# Altium PCB Camera.PcbDoc
Units mm, origin at the board's own origin, x right, y up, seen from the top; angles counter-clockwise.
Board outline 25 x 19.75 mm, 2 copper layers (Top Layer, Bottom Layer); 3 components, 0 nets, 59 pads, 0 vias.
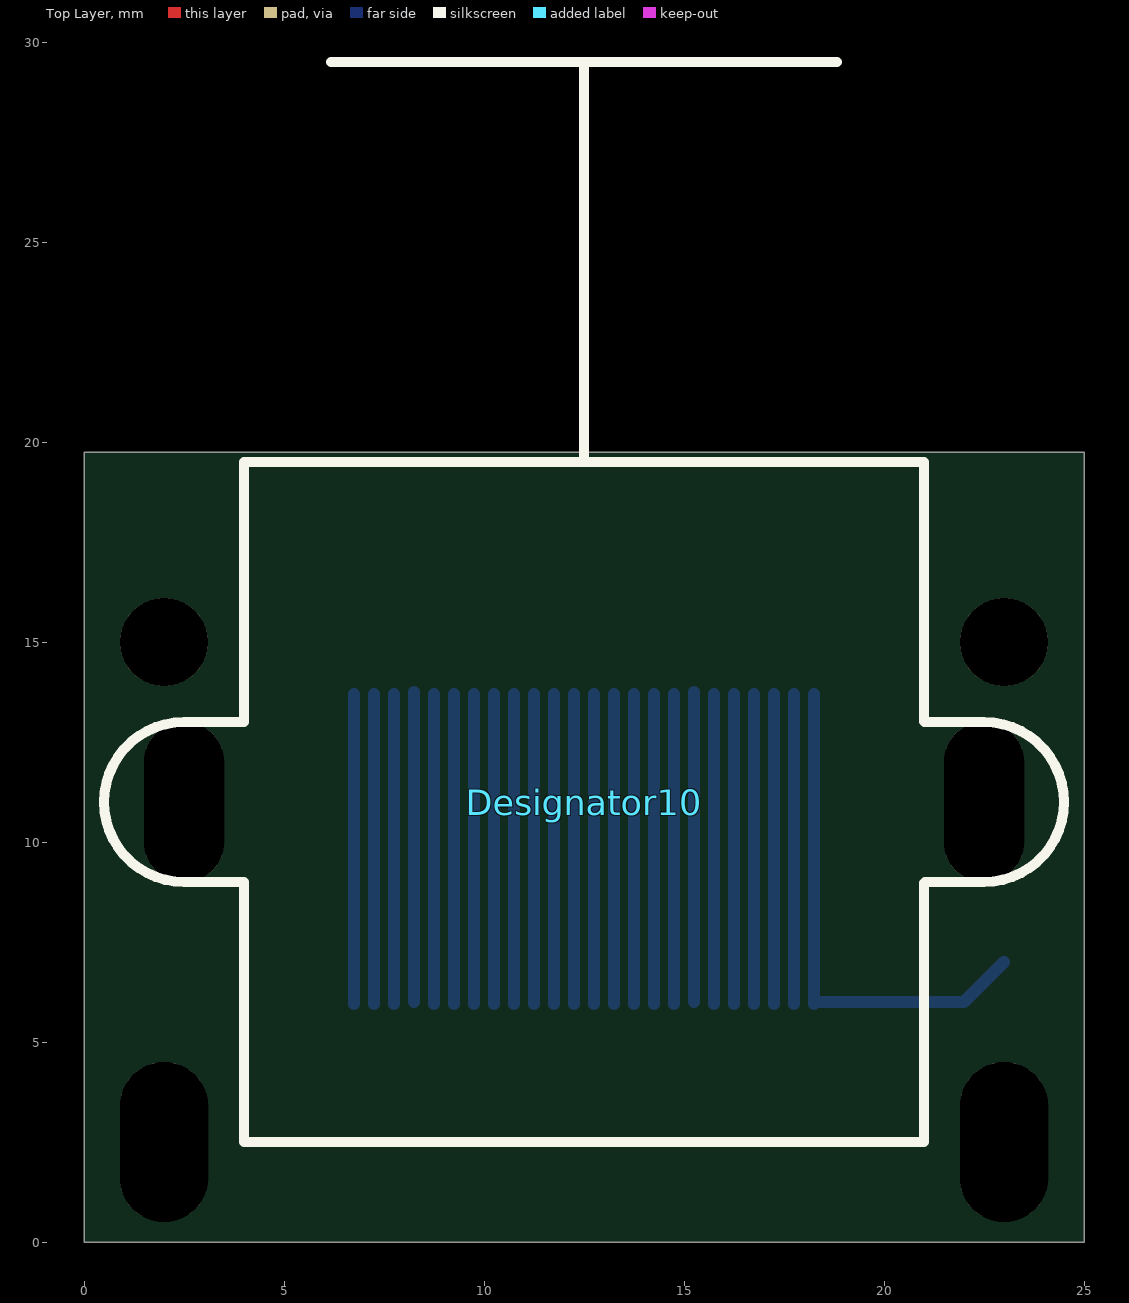
[diagram p0: Top Layer view]
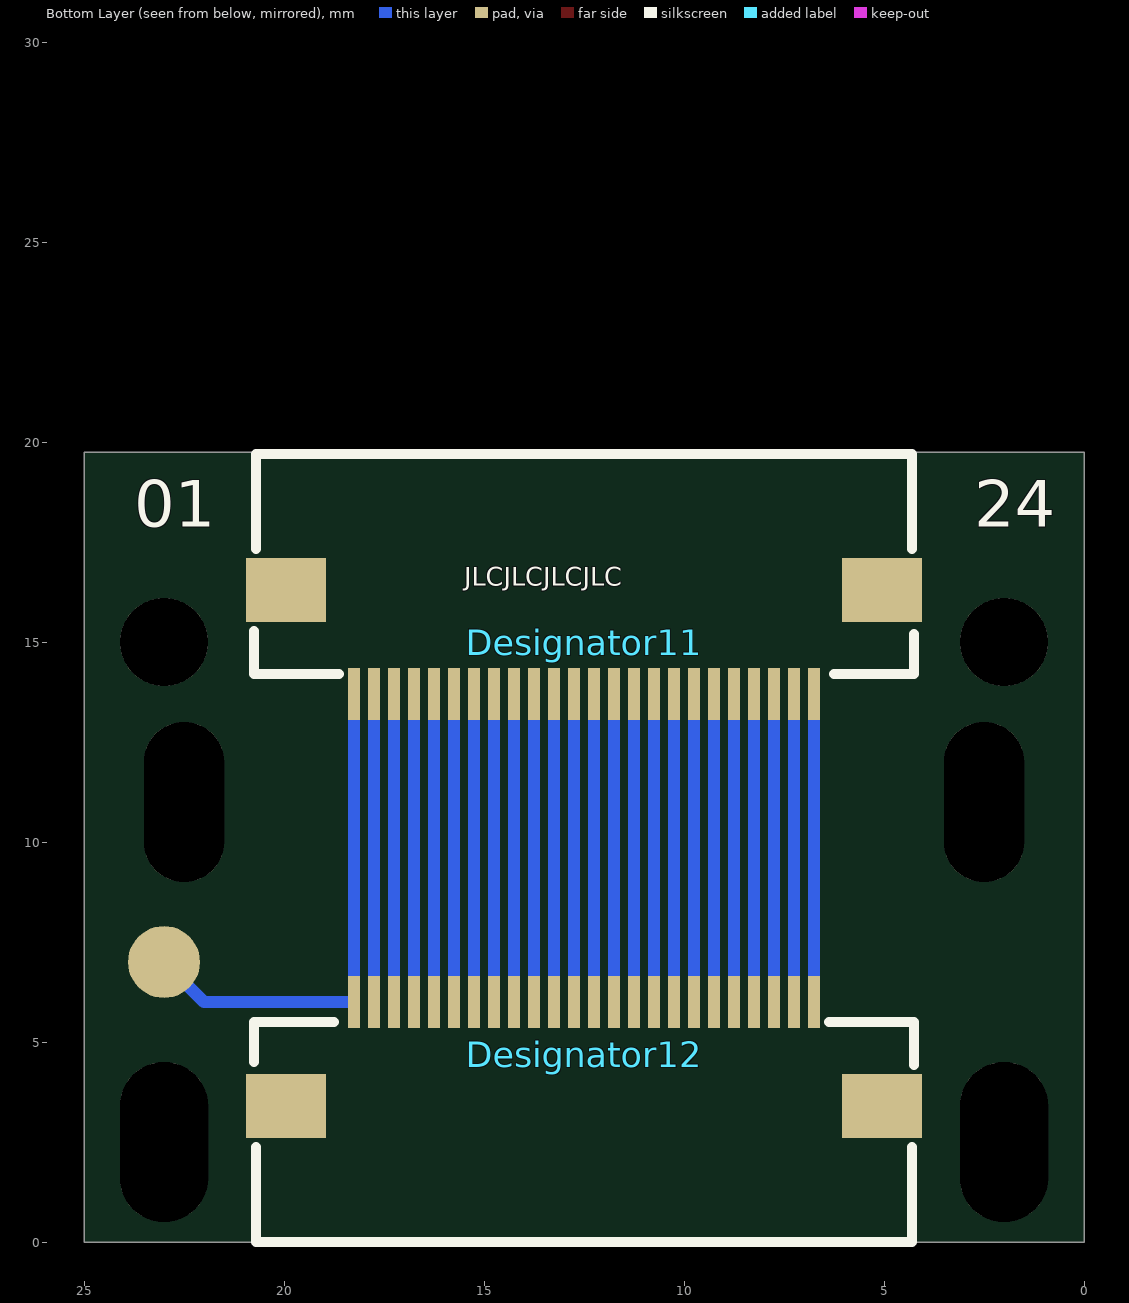
[diagram p1: Bottom Layer view, seen from below]

## Layer stack, top to bottom
Top Solder: solder mask 0.0102, Solder Resist, Dk 3.5
Top Layer: signal copper 0.0356
Dielectric 1: dielectric 0.32, FR-4, Dk 4.8
Bottom Layer: signal copper 0.0356
Bottom Solder: solder mask 0.0102, Solder Resist, Dk 3.5

## Board outline
0,0 0,19.75 25,19.75 25,0

## Design rules (kind name [scope] priority, off if disabled: settings)
Clearance [All] p1: gap=0.3 ignorepadtopadclearanceinfootprint=FALSE
PolygonConnect [All] p1: connectstyle=Relief reliefconductorwidth=0.254 reliefentries=4 polygonreliefangle="90 Angle" airgapwidth=0.254
RoutingVias [All] p1: holewidth=0.711 width=1.27 viastyle="Through Hole" minholewidth=0.711 minwidth=1.27 maxholewidth=0.711 maxwidth=1.27
SolderMaskExpansion [All] p1: expansion=0.102
Width [All] p1: maxlimit=10 minlimit=0.254 preferedwidth=0.254
30 further rules are at their usual default settings.

## Components (designator, comment, footprint, x,y, rotation, side; value= is the part's Value field where it differs from the comment)
Designator10 "Comment" OV2640M12 12.5,11 r180 top
Designator11 "Comment" FPC-SMD_P0.50-24P_FGS-XJ-H2.0 12.5,15 r180 bottom
Designator12 "Comment" FPC-SMD_P0.50-24P_FGS-XJ-H2.0 12.498,4.699 r0 bottom

## Footprints (in the part's own frame and the unit in brackets; to place one, negate y for a bottom-side part, rotate by r counter-clockwise, add the part's x,y. Pads: shape width x height; smd on the part's side, far side on the other; paste and mask are expansions set on the pad)
FPC-SMD_P0.50-24P_FGS-XJ-H2.0 [mm]
  rect 0.3x1.3 smd: 1(-5.748,-1.301) 2(-5.248,-1.301) 3(-4.748,-1.301) 4(-4.248,-1.301) 5(-3.748,-1.301) 6(-3.248,-1.301) 7(-2.748,-1.301) 8(-2.248,-1.301) 9(-1.748,-1.301) 10(-1.248,-1.301) 11(-0.748,-1.301) 12(-0.248,-1.301) 13(0.252,-1.301) 14(0.752,-1.301) 15(1.252,-1.301) 16(1.752,-1.301) 17(2.252,-1.301) 18(2.752,-1.301) 19(3.252,-1.301) 20(3.752,-1.301) 21(4.252,-1.301) 22(4.752,-1.301) 23(5.252,-1.301) 24(5.752,-1.301)
  rect 2x1.6 smd: 25(7.45,1.301) 26(-7.45,1.301)
  silkscreen extent -8.25,-0.8 8.25,4.7
OV2640M12 [mm]
  oval 2x4 hole 4 slot 2 at 0 deg: 0(-10,0) 0(10,0)
  silkscreen extent -12,-18.5 12,8.5

## Free pads (board coordinates)
  oval 2.2x4 hole 4 slot 2.2 at 0 deg: 0(2,2.5) 0(23,2.5)
  round 2.2 hole 2.2: 0(2,15) 0(23,15)
  round 1.8 smd far side: 1(23,7)

## Nets (pads, with @x,y where several pads share a name; then routed paths per layer and width w, separated by ;. In a path a pad name is that pad's centre, name@x,y a point inside that pad or via, vN(x,y) a via of type N, cw(c..) or ccw(c..) an arc to the next point about the centre after c; other vN are vias at no path point)
pads on no net: Designator10.0 Designator11.1 Designator11.2 Designator11.3 Designator11.4 Designator11.5 Designator11.6 Designator11.7 Designator11.8 Designator11.9 Designator11.10 Designator11.11 Designator11.12 Designator11.13 Designator11.14 Designator11.15 Designator11.16 Designator11.17 Designator11.18 Designator11.19 Designator11.20 Designator11.21 Designator11.22 Designator11.23 Designator11.24 Designator11.25 Designator11.26 Designator12.1 Designator12.2 Designator12.3 Designator12.4 Designator12.5 Designator12.6 Designator12.7 Designator12.8 Designator12.9 Designator12.10 Designator12.11 Designator12.12 Designator12.13 Designator12.14 Designator12.15 Designator12.16 Designator12.17 Designator12.18 Designator12.19 Designator12.20 Designator12.21 Designator12.22 Designator12.23 Designator12.24 Designator12.25 Designator12.26
copper on no net: | length 191.2
  Bottom Layer w0.3: 6.748,5.949 6.748,13.699 ; 7.248,5.949 7.248,13.699 ; 7.748,5.949 7.748,13.699 ; 8.25,6 8.25,13.75 ; 8.748,5.949 8.748,13.699 ; 9.248,5.949 9.248,13.699 ; 9.748,5.949 9.748,13.699 ; 10.248,5.949 10.248,13.699 ; 10.748,5.949 10.748,13.699 ; 11.248,5.949 11.248,13.699 ; 11.748,5.949 11.748,13.699 ; 12.248,5.949 12.248,13.699 ; 12.748,5.949 12.748,13.699 ; 13.248,5.949 13.248,13.699 ; 13.748,5.949 13.748,13.699 ; 14.248,5.949 14.248,13.699 ; 14.748,5.949 14.748,13.699 ; 15.25,6 15.25,13.75 ; 15.748,5.949 15.748,13.699 ; 16.248,5.949 16.248,13.699 ; 16.748,5.949 16.748,13.699 ; 17.248,5.949 17.248,13.699 ; 17.748,5.949 17.748,13.699 ; 18.248,5.949 18.248,13.699 ; 18.25,6 22,6 23,7

## Silkscreen, mask and mechanical layers (free items; w line width, h text height)
Bottom Overlay:
  text "24" at 2.75,17.5 h2
  text "01" at 23.75,17.5 h2
  text "JLCJLCJLCJLC" at 15.5,16.25 h0.8
Mechanical 1:
  lines w0.254: 0,0 0,19.75 25,19.75 25,0 0,0 ; 1,1.5 ccw(c2,1.5) 3,1.5 3,3.5 ccw(c2,3.5) 1,3.5 1,1.5 ; 1.5,10 ccw(c2.5,10) 3.5,10 3.5,12 ccw(c2.5,12) 1.5,12 1.5,10 ; 21.5,10 ccw(c22.5,10) 23.5,10 23.5,12 ccw(c22.5,12) 21.5,12 21.5,10 ; 22,1.5 ccw(c23,1.5) 24,1.5 24,3.5 ccw(c23,3.5) 22,3.5 22,1.5